# Altium PCB distance measurement.PcbDoc
Units mil, origin at the board's own origin, x right, y up, seen from the top; angles counter-clockwise.
Board outline 6000 x 4000 mil, 2 copper layers (Top Layer, Bottom Layer); 4 components, 8 nets, 40 pads, 0 vias.
Unrouted connection lines stored in the file: 15.
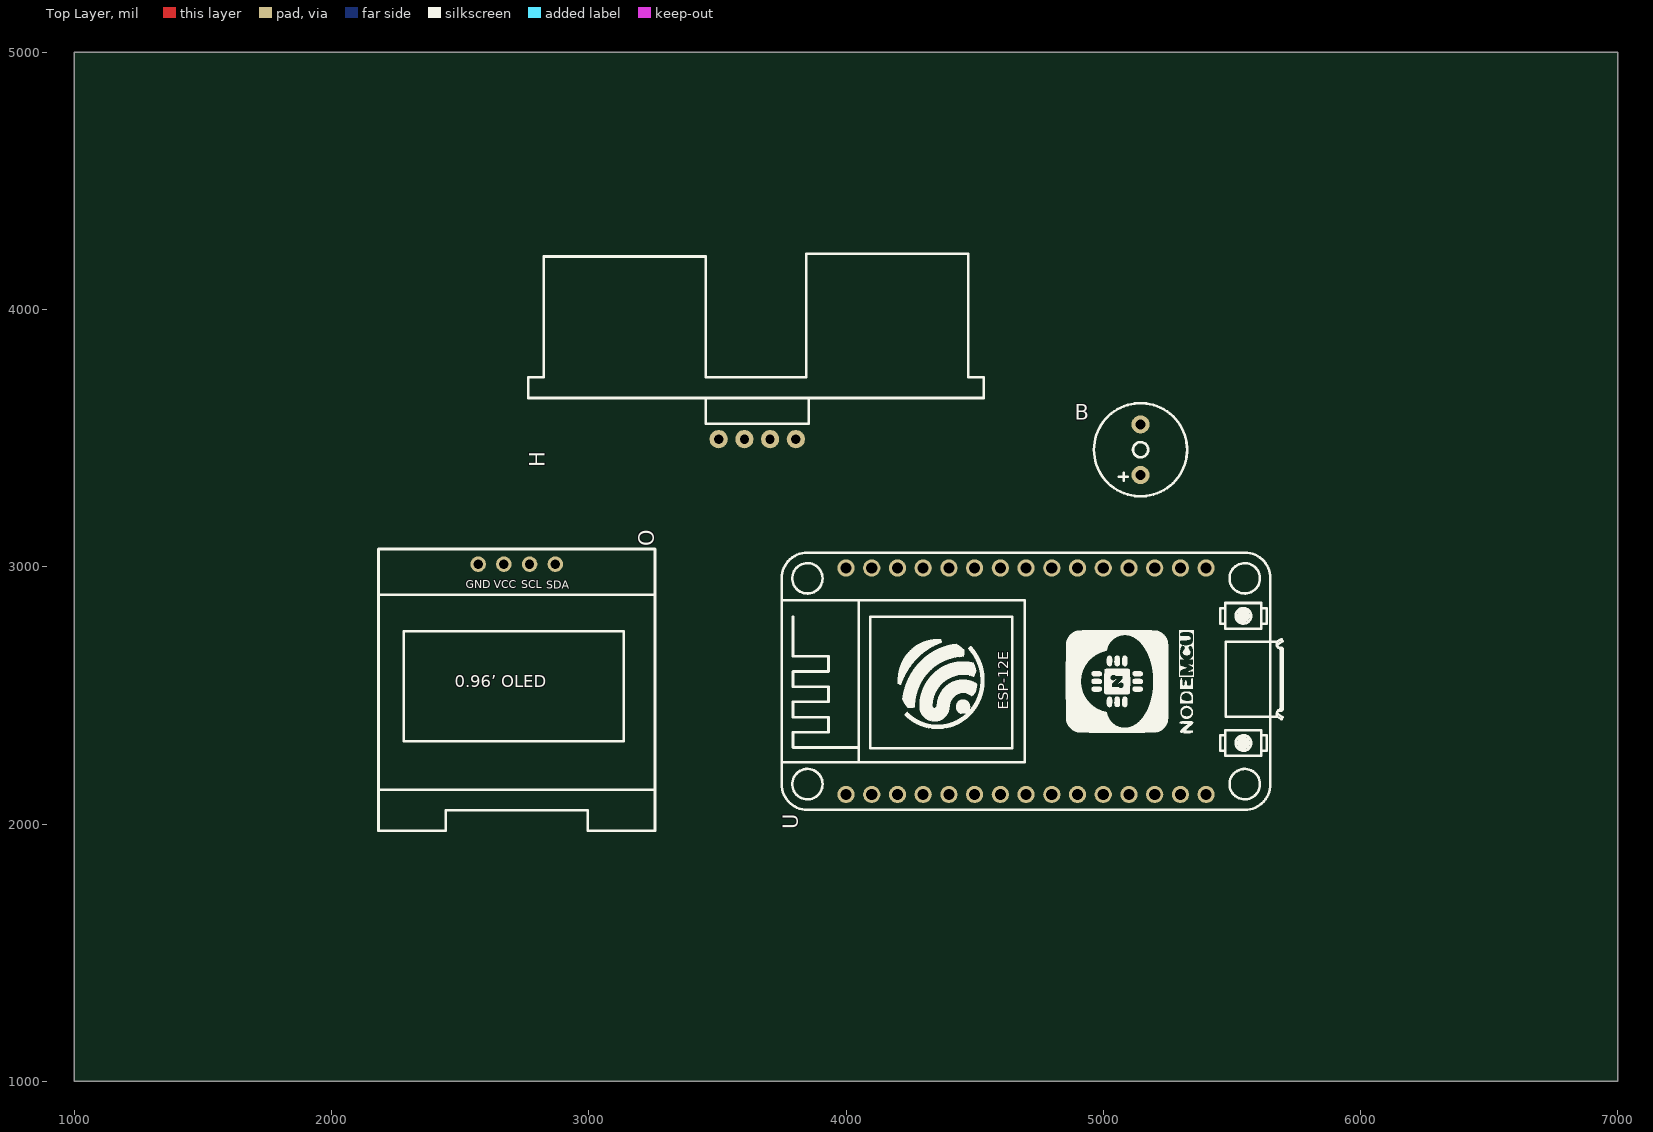
[diagram p0: Top Layer view]
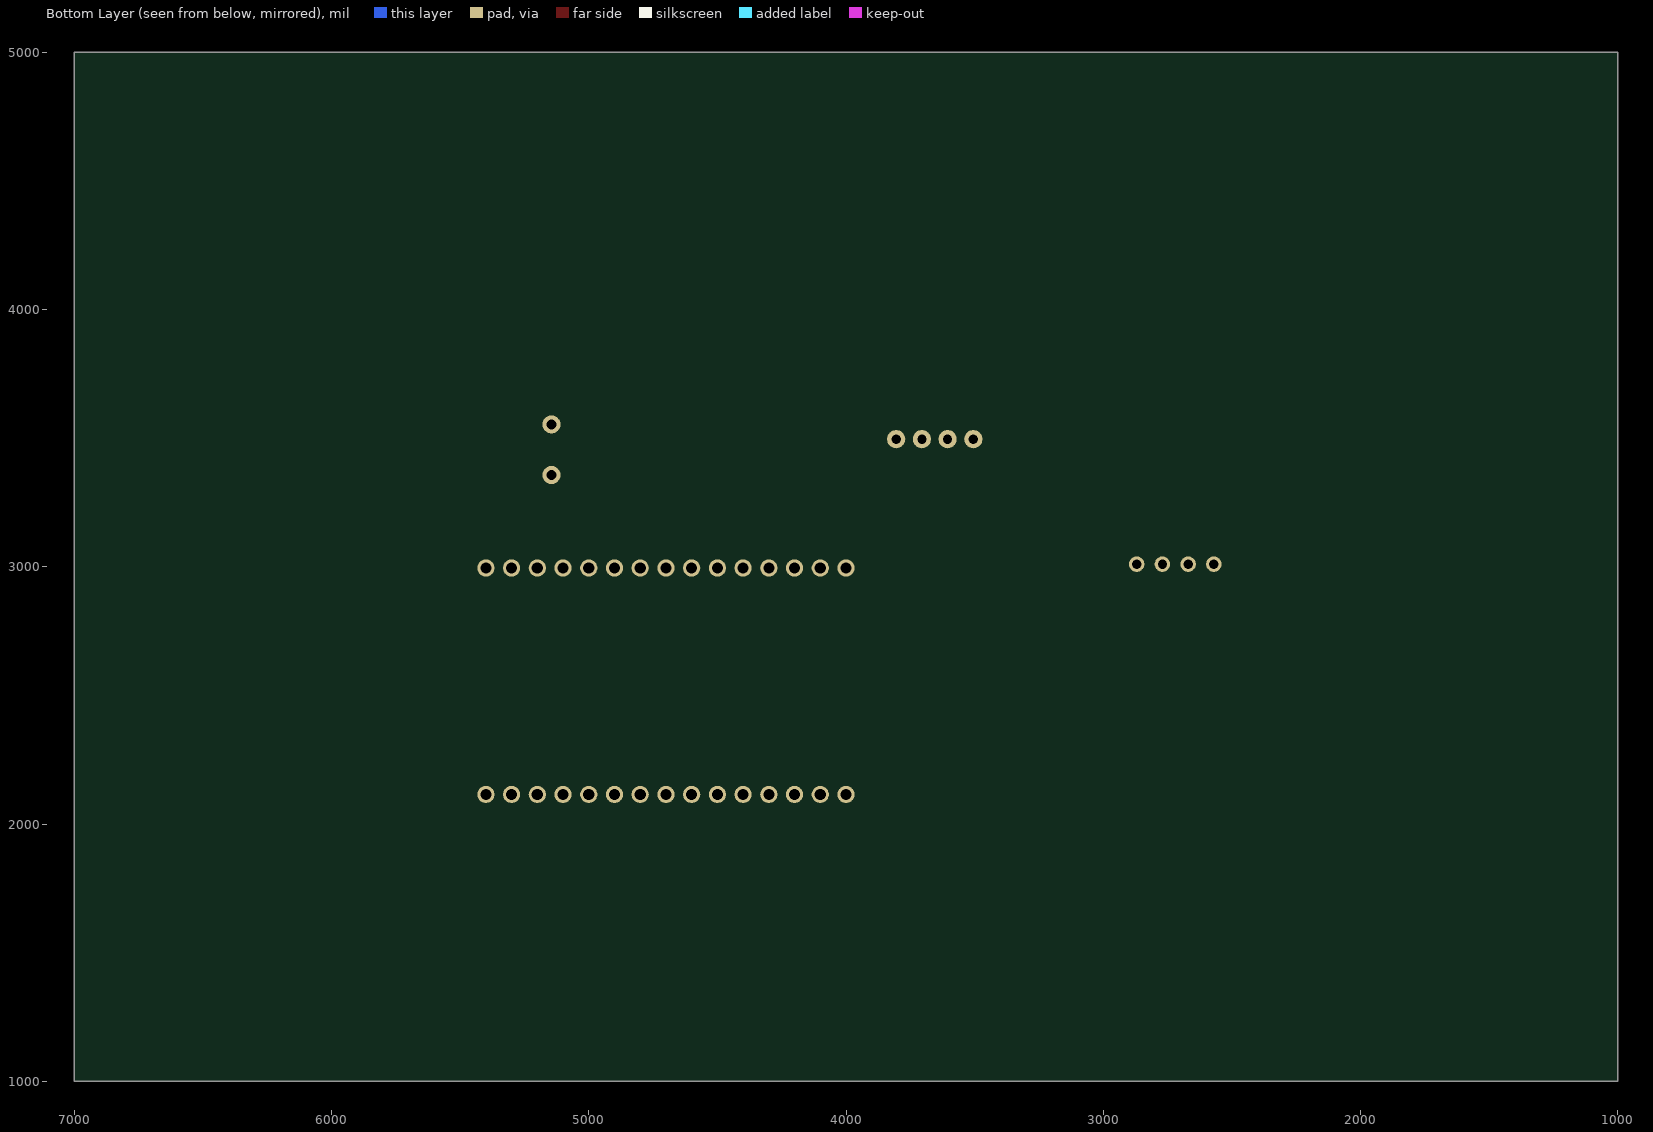
[diagram p1: Bottom Layer view, seen from below]

## Layer stack, top to bottom
Top Solder: solder mask 0.4, Solder Resist, Dk 3.5
Top Layer: signal copper 1.4
Dielectric 1: dielectric 12.6, FR-4, Dk 4.8
Bottom Layer: signal copper 1.4
Bottom Solder: solder mask 0.4, Solder Resist, Dk 3.5

## Board outline
1000,1000 7000,1000 7000,5000 1000,5000

## Design rules (kind name [scope] priority, off if disabled: settings)
Clearance [All] p1: gap=10
PolygonConnect [All] p1: connectstyle=Relief reliefconductorwidth=10 reliefentries=4 polygonreliefangle="90 Angle" airgapwidth=10
RoutingVias [All] p1: holewidth=28 width=50 viastyle="Through Hole" minholewidth=28 minwidth=50 maxholewidth=28 maxwidth=50
SolderMaskExpansion [All] p1: expansion=4
Width [All] p1: maxlimit=10 minlimit=10 preferedwidth=10
30 further rules are at their usual default settings.

## Components (designator, comment, footprint, x,y, rotation, side; value= is the part's Value field where it differs from the comment)
B "BEEP" BUZ-TH_BD9.0-P5.00-D0.6-FD 5145,3455 r90 top
H "HC-SR04" HC-SR04 3650,3835 r180 top
O "OLED" 0.96OLEDIIC 2720.1,2521.81 r0 top
U "NodeMCU" "PCBComponent_1 - duplicate" 4723.81,2555 r90 top

## Footprints (in the part's own frame and the unit in brackets; to place one, negate y for a bottom-side part, rotate by r counter-clockwise, add the part's x,y. Pads: shape width x height; smd on the part's side, far side on the other; paste and mask are expansions set on the pad)
0.96OLEDIIC [mil]
  round 60 hole 36 paste+0 mask+4: 35(-150.1,488.19) 36(-50.1,488.19) 37(49.9,488.19) 38(149.9,488.19)
  silkscreen extent -538,-547 538,547
BUZ-TH_BD9.0-P5.00-D0.6-FD [mm]
  round 1.8 hole 1 paste+0 mask+0.051: 39(-2.5,0) 40(2.5,0)
  silkscreen extent -4.6,-4.6 4.6,4.6
HC-SR04 [mil]
  round 70.87 hole 36 paste+0 mask+4: 31(-155,338.88) 32(-55,338.88) 33(45,338.88) 34(145,338.88)
  silkscreen extent -885,-381 885,279
"PCBComponent_1 - duplicate" [mm]
  round 1.7 hole 1.1 paste+0 mask+0.102: 1(-11.176,18.385) 2(-11.176,15.845) 3(-11.176,13.305) 4(-11.176,10.765) 5(-11.176,8.225) 6(-11.176,5.685) 7(-11.176,3.145) 8(-11.176,0.605) 9(-11.176,-1.935) 10(-11.176,-4.475) 11(-11.176,-7.015) 12(-11.176,-9.555) 13(-11.176,-12.095) 14(-11.176,-14.635) 15(-11.176,-17.175) 16(11.176,18.385) 17(11.176,15.845) 18(11.176,13.305) 19(11.176,10.765) 20(11.176,8.225) 21(11.176,5.685) 22(11.176,3.145) 23(11.176,0.605) 24(11.176,-1.935) 25(11.176,-4.475) 26(11.176,-7.015) 27(11.176,-9.555) 28(11.176,-12.095) 29(11.176,-14.635) 30(11.176,-17.175)
  silkscreen extent -12.7,-24.73 12.7,24.73

## Nets (pads, with @x,y where several pads share a name; then routed paths per layer and width w, separated by ;. In a path a pad name is that pad's centre, name@x,y a point inside that pad or via, vN(x,y) a via of type N, cw(c..) or ccw(c..) an arc to the next point about the centre after c; other vN are vias at no path point)
3V3: U.11 U.21 U.30
5V: H.31 O.36 U.15
BUZ: B.39 U.25
ECHO: H.33 U.17
GND: B.40 H.34 O.35 U.10 U.14 U.22 U.29
SCL: O.37 U.23
SDA: O.38 U.19
TRIG: H.32 U.18
pads on no net: U.1 U.2 U.3 U.4 U.5 U.6 U.7 U.8 U.9 U.12 U.13 U.16 U.20 U.24 U.26 U.27 U.28

## Text inside footprints (layer, text, board x,y; h text height)
O: Top Overlay "0.96’ OLED" at 2479,2515.45 h80; Top Overlay "SDA" at 2835.1,2914.31 h31.5; Top Overlay "SCL" at 2737.6,2916.81 h31.5; Top Overlay "VCC" at 2630.1,2916.81 h31.5; Top Overlay "GND" at 2522.6,2916.81 h31.5
U: Top Overlay "ESP-12E" at 4630,2445 h40 r90